# Altium PCB editable.pcbdoc
Units mil, origin at the board's own origin, x right, y up, seen from the top; angles counter-clockwise.
Board outline 2420 x 3435 mil, 2 copper layers (Top Layer, Bottom Layer); 17 components, 34 nets, 149 pads, 4 vias.
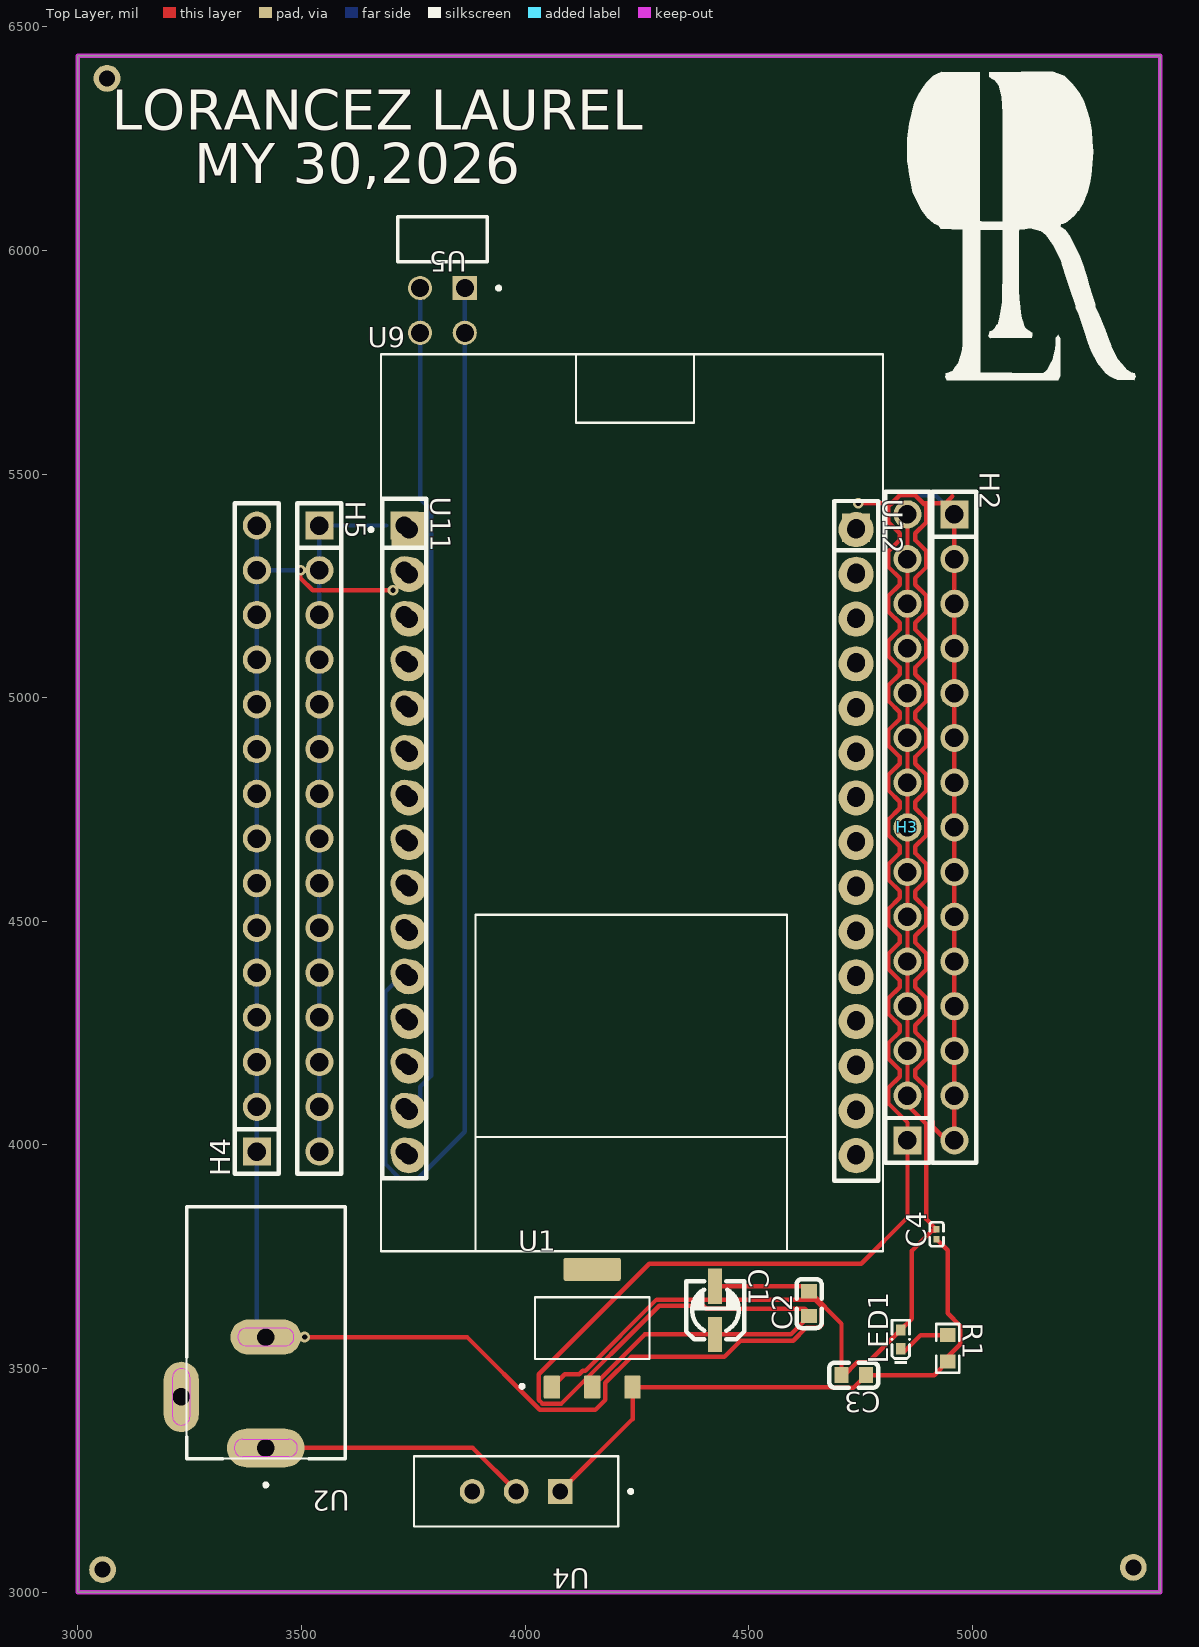
[diagram p0: Top Layer view]
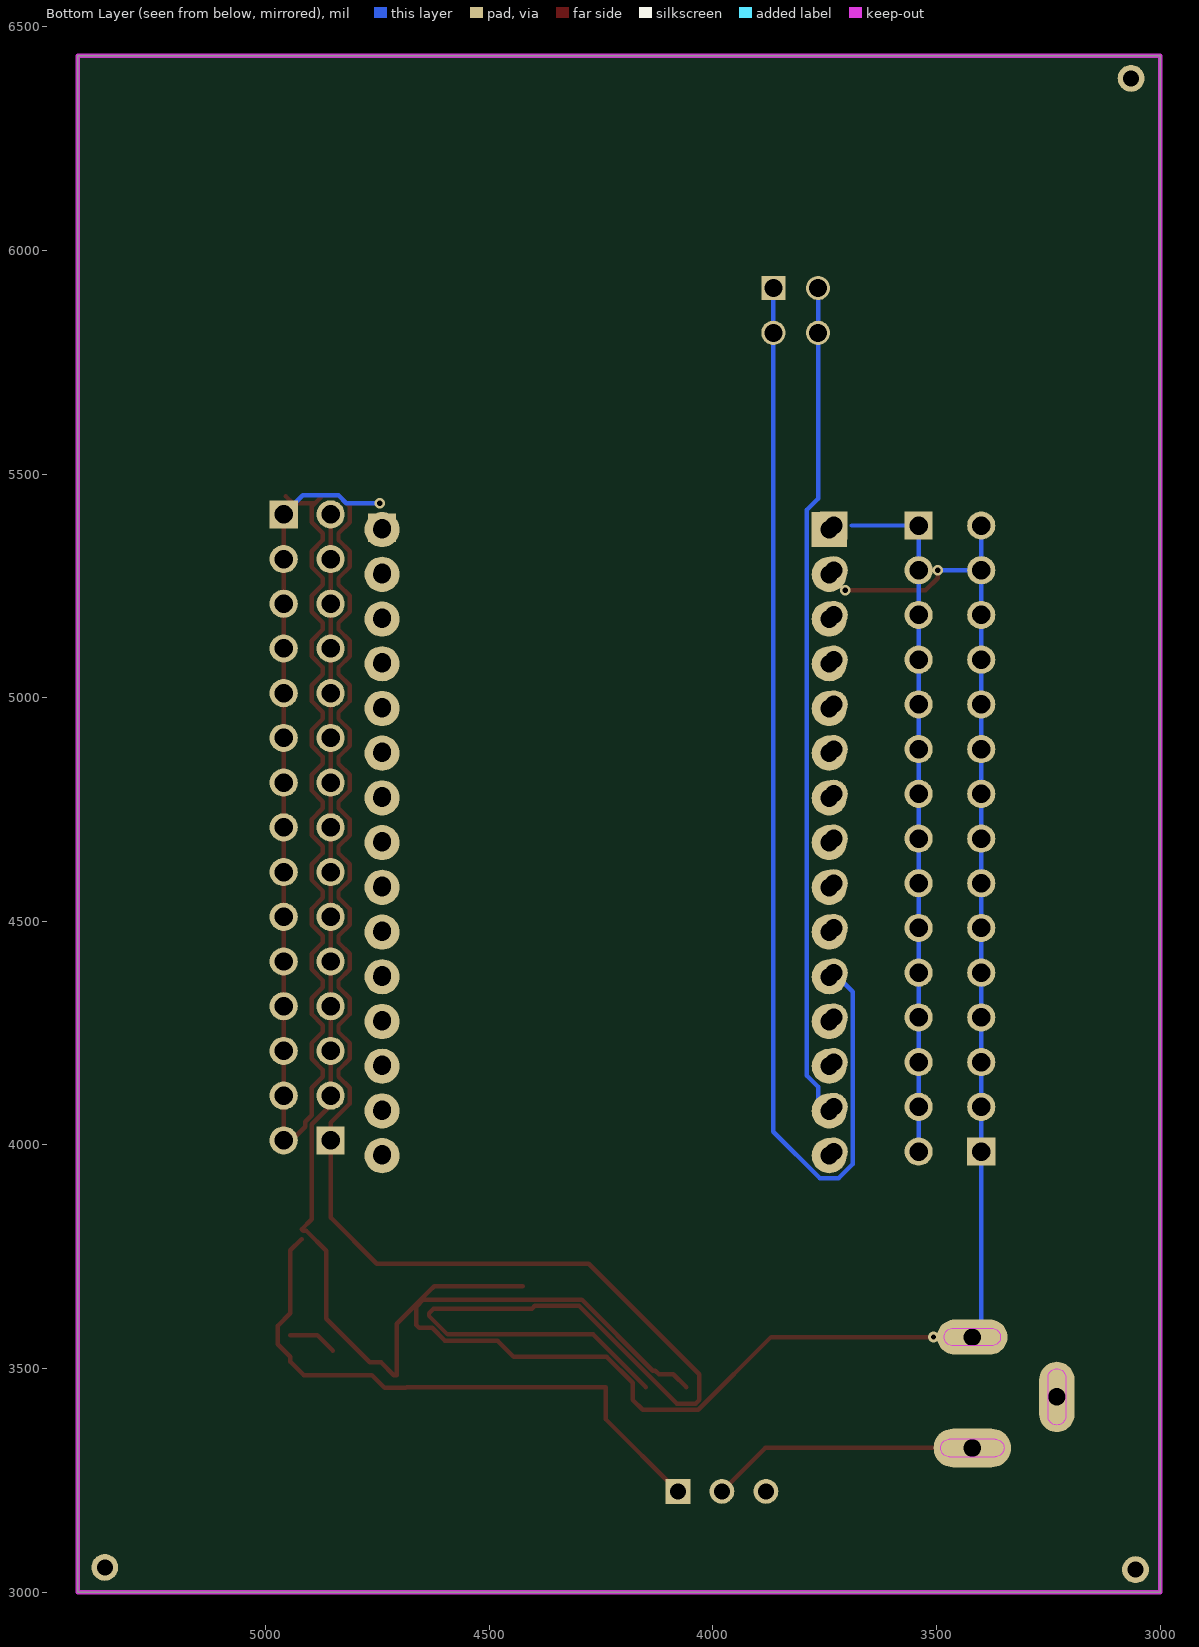
[diagram p1: Bottom Layer view, seen from below]

## Layer stack, top to bottom
Top Layer: signal copper (thickness not stored)
Dielectric: dielectric 12.6, FR-4, Dk 4.8
Bottom Layer: signal copper (thickness not stored)

## Board outline
3000,6435 5420,6435 5420,3000 3000,3000

## Design rules (kind name [scope] priority, off if disabled: settings)
BoardOutlineClearance copperThickness1oz [All] p0: genericclearance=10 ignorepadtopadclearanceinfootprint=FALSE except(0: Arc-SplitContinuation Track-SplitContinuation SMDPad-SplitContinuation THPad-SplitContinuation Via-SplitContinuation Fill-SplitContinuation Poly-SplitContinuation Region-SplitContinuation Text-SplitContinuation; 6: Track-CutoutEdge SMDPad-CutoutEdge THPad-CutoutEdge Via-CutoutEdge Region-CutoutEdge; 11.8: Track-OutlineEdge SMDPad-OutlineEdge THPad-OutlineEdge Via-OutlineEdge Fill-OutlineEdge Region-OutlineEdge Poly-OutlineEdge Text-OutlineEdge Fill-CutoutEdge)
BoardOutlineClearance copperThickness2oz [All] p0: genericclearance=10 ignorepadtopadclearanceinfootprint=FALSE except(0: Arc-SplitContinuation Track-SplitContinuation SMDPad-SplitContinuation THPad-SplitContinuation Via-SplitContinuation Fill-SplitContinuation Poly-SplitContinuation Region-SplitContinuation Text-SplitContinuation; 6: Track-CutoutEdge SMDPad-CutoutEdge THPad-CutoutEdge Via-CutoutEdge Region-CutoutEdge; 11.8: Track-OutlineEdge SMDPad-OutlineEdge THPad-OutlineEdge Via-OutlineEdge Fill-OutlineEdge Region-OutlineEdge Poly-OutlineEdge Text-OutlineEdge Fill-CutoutEdge)
Clearance copperThickness1oz [(InNet('GND') OR InNet('+5V') OR InNet('D13') OR InNet('D12') OR InNet('D14') OR InNet('D27') OR InNet('D26') OR InNet('D25') OR InNet('D33') OR InNet('D32') OR InNet('D35') OR InNet('D34') OR InNet('VN') OR InNet('VP') OR InNet('EN') OR InNet('VCC') OR InNet('D21') OR InNet('D22') OR InNet('3V3') OR InNet('D15') OR InNet('D2') OR InNet('D4') OR InNet('RX2') OR InNet('TX2') OR InNet('D5') OR InNet('D18') OR InNet('D19') OR InNet('RX0') OR InNet('TX0') OR InNet('D23') OR InNet('$1N9308') OR InNet('+3V3') OR InNet('VIN') OR InNet('$1N9299'))] p1: gap=7 ignorepadtopadclearanceinfootprint=FALSE except(4: Track-Track; 6: Track-SMDPad SMDPad-SMDPad Track-THPad SMDPad-THPad THPad-THPad Track-Via SMDPad-Via THPad-Via Via-Via SMDPad-Fill THPad-Fill Via-Fill Fill-Fill Track-Region SMDPad-Region THPad-Region Via-Region Region-Region Track-Poly SMDPad-Poly THPad-Poly Via-Poly Fill-Poly Region-Poly Poly-Poly Track-Text SMDPad-Text THPad-Text Via-Text Fill-Text Region-Text Poly-Text Text-Text; 6.9: Track-Hole SMDPad-Hole THPad-Hole Via-Hole Fill-Hole Region-Hole Poly-Hole Text-Hole Sheet-Hole; 11.8: Track-Fill Fill-Region Track-Sheet SMDPad-Sheet THPad-Sheet Via-Sheet Fill-Sheet Region-Sheet Poly-Sheet Text-Sheet)
Clearance copperThickness2oz [All] p1: gap=7 ignorepadtopadclearanceinfootprint=FALSE except(6: Track-SMDPad SMDPad-SMDPad Track-THPad SMDPad-THPad THPad-THPad Track-Via SMDPad-Via THPad-Via Via-Via SMDPad-Fill THPad-Fill Via-Fill Fill-Fill Track-Region SMDPad-Region THPad-Region Via-Region Region-Region Track-Poly SMDPad-Poly THPad-Poly Via-Poly Fill-Poly Region-Poly Poly-Poly Track-Text SMDPad-Text THPad-Text Via-Text Fill-Text Region-Text Poly-Text Text-Text; 6.9: Track-Hole SMDPad-Hole THPad-Hole Via-Hole Fill-Hole Region-Hole Poly-Hole Text-Hole Sheet-Hole; 8: Track-Track; 11.8: Track-Fill Fill-Region Track-Sheet SMDPad-Sheet THPad-Sheet Via-Sheet Fill-Sheet Region-Sheet Poly-Sheet Text-Sheet)
DiffPairsRouting differentialPair [All] p1: maxuncoupledlength=10 minlimit=6 maxlimit=6 mostfreqgap=6 toplayer_minwidth=5 toplayer_prefwidth=10 toplayer_maxwidth=100 bottomlayer_minwidth=5 bottomlayer_prefwidth=10 bottomlayer_maxwidth=100
PasteMaskExpansion pasteMaskExpansion [All] p1: expansion=0
PlaneConnect innerPlane [All] p1: planeconnectstyle=Relief reliefexpansion=20 reliefentries=4 reliefconductorwidth=10 reliefairgap=10
PolygonConnect copperRegion [All] p1: connectstyle=Relief reliefentries=4 reliefconductorwidth=10 polygonreliefangle="90 Angle" airgapwidth=10
RoutingVias viaSize [All] p1: viastyle="Through Hole" holewidth=12.0078 minholewidth=11.811 maxholewidth=248.0314 width=24.0158 minwidth=19.685 maxwidth=393.7008
SolderMaskExpansion solderMaskExpansion [All] p1: useseparateexpansions=TRUE expansion=2 expansionbottom=2
Width copperThickness1oz [All] p1: maxlimit=100 minlimit=5 preferedwidth=10
Width copperThickness2oz [All] p1: maxlimit=100 minlimit=8 preferedwidth=10

## Components (designator, comment, footprint, x,y, rotation, side; value= is the part's Value field where it differs from the comment)
C1 "C_Ele_SMD_3x5.4mm" CAP-SMD_BD3.0-L3.3-W3.3-RD 4425,3630 r270 top
C2 "CAP_0603" C0603 4635,3645 r90 top
C3 "CAP_0603" C0603 4735,3485 r180 top
C4 "CAP_0201" C0201 4920,3800 r90 top
H2 "2011-1X15G00SB" HDR-TH_15P-P2.54-V-M 4960,4710 r270 top
H3 "2011-1X15G00SB" HDR-TH_15P-P2.54-V-M 4855,4710 r90 top
H4 "2011-1X15G00SB" HDR-TH_15P-P2.54-V-M 3400,4685 r90 top
H5 "2011-1X15G00SB" HDR-TH_15P-P2.54-V-M 3540,4685 r270 top
LED1 "LED_0402-R" LED0402-RD_YELLOW 4840,3565 r90 top
R1 "Res_0603" R0603 4945,3545 r270 top
U1 "AMS1117-5.0" SOT229P700X180-4N 4150,3590 r0 top
U2 "DCJ200-10-A-XX-K_REVA" GCT_DCJ200-10-A-XX-K_REVA 3420,3580 r180 top
U4 "MINI-SPDT-SW" SW_MINI-SPDT-SW 3980,3225 r180 top
U5 "MTSW-102-10-L-D-472-RA" SAMTEC_MTSW-102-10-L-D-472-RA 3815,6025 r180 top
U9 "ESP32-DEVKIT-V1" MODULE_ESP32_DEVKIT_V1 4240,4765 r0 top
U11 "HX PM2.54-1x15P ZC" HDR-TH_15P-P2.54-V-F-1 3730,4685 r270 top
U12 "HX PM2.54-1x15P ZC" HDR-TH_15P-P2.54-V-F-1 4740,4680 r270 top

## Footprints (in the part's own frame and the unit in brackets; to place one, negate y for a bottom-side part, rotate by r counter-clockwise, add the part's x,y. Pads: shape width x height; smd on the part's side, far side on the other; paste and mask are expansions set on the pad)
C0201 [mil]
  rect 14.51x12.76 smd: 1(-10.8,0) 2(10.8,0)
  silkscreen extent -27,-15 27,15
C0603 [mm]
  rect 0.8x0.9 smd: 1(-0.7,0) 2(0.7,0)
  silkscreen extent -1.39,-0.71 1.39,0.71
CAP-SMD_BD3.0-L3.3-W3.3-RD [mm]
  rect 2x0.8 smd: 1(1.37,0) 2(-1.37,0)
  silkscreen extent -1.65,-1.64 1.65,1.66
GCT_DCJ200-10-A-XX-K_REVA [mm]
  oval 4.4x2.2 hole 1: 1(0,6.55)
  oval 4x2 hole 1: 2(0,0.25)
  oval 2x4 hole 1: 3(4.8,3.65)
  Board Outline Layer lines w0.003: 5.3,4.75 5.3,2.55 ; 5.3,4.75 5.3,2.55 ; 5.3,4.75 ccw(c4.8,4.75) 4.8,5.25 ; 5.3,4.75 ccw(c4.8,4.75) 4.8,5.25 ; 5.3,2.55 cw(c4.8,2.55) 4.8,2.05 ; 5.3,2.55 cw(c4.8,2.55) 4.8,2.05 ; 4.8,5.25 ccw(c4.8,4.75) 4.3,4.75 ; 4.8,5.25 ccw(c4.8,4.75) 4.3,4.75 ; 4.8,2.05 cw(c4.8,2.55) 4.3,2.55 ; 4.8,2.05 cw(c4.8,2.55) 4.3,2.55 ; 4.3,4.75 4.3,2.55 ; 4.3,4.75 4.3,2.55 ; 1.8,6.55 ccw(c1.3,6.55) 1.3,7.05 ; 1.8,6.55 ccw(c1.3,6.55) 1.3,7.05 ; 1.8,6.55 cw(c1.3,6.55) 1.3,6.05 ; 1.8,6.55 cw(c1.3,6.55) 1.3,6.05 ; 1.6,0.25 cw(c1.1,0.25) 1.1,-0.25 ; 1.6,0.25 cw(c1.1,0.25) 1.1,-0.25 ; 1.6,0.25 ccw(c1.1,0.25) 1.1,0.75 ; 1.6,0.25 ccw(c1.1,0.25) 1.1,0.75 ; 1.3,7.05 -1.3,7.05 ; 1.3,7.05 -1.3,7.05 ; 1.3,6.05 -1.3,6.05 ; 1.3,6.05 -1.3,6.05 ; 1.1,0.75 -1.1,0.75 ; 1.1,0.75 -1.1,0.75 ; 1.1,-0.25 -1.1,-0.25 ; 1.1,-0.25 -1.1,-0.25 ; -1.1,0.75 ccw(c-1.1,0.25) -1.6,0.25 ; -1.1,0.75 ccw(c-1.1,0.25) -1.6,0.25 ; -1.1,-0.25 cw(c-1.1,0.25) -1.6,0.25 ; -1.1,-0.25 cw(c-1.1,0.25) -1.6,0.25 ; -1.3,7.05 ccw(c-1.3,6.55) -1.8,6.55 ; -1.3,7.05 ccw(c-1.3,6.55) -1.8,6.55 ; -1.3,6.05 cw(c-1.3,6.55) -1.8,6.55 ; -1.3,6.05 cw(c-1.3,6.55) -1.8,6.55
  silkscreen extent -4.5,-7.15 4.5,8.75
HDR-TH_15P-P2.54-V-F-1 [mm]
  rect 1.6x1.575 hole 1: 1(-17.78,0)
  round 1.6 hole 1: 2(-15.24,0) 3(-12.7,0) 4(-10.16,0) 5(-7.62,0) 6(-5.08,0) 7(-2.54,0) 8(0,0) 9(2.54,0) 10(5.08,0) 11(7.62,0) 12(10.16,0) 13(12.7,0) 14(15.24,0) 15(17.78,0)
  silkscreen extent -19.3,-1.25 19.3,1.25
HDR-TH_15P-P2.54-V-M [mm]
  rect 1.6x1.6 hole 1.05: 1(-17.78,0)
  round 1.6 hole 1.05: 2(-15.24,0) 3(-12.7,0) 4(-10.16,0) 5(-7.62,0) 6(-5.08,0) 7(-2.54,0) 8(0,0) 9(2.54,0) 10(5.08,0) 11(7.62,0) 12(10.16,0) 13(12.7,0) 14(15.24,0) 15(17.78,0)
  silkscreen extent -19.05,-1.25 19.05,1.25
LED0402-RD_YELLOW [mm]
  rect 0.636x0.54 smd: 1(-0.538,0) 2(0.538,0)
  silkscreen extent -1.39,-0.54 1.09,0.54
MODULE_ESP32_DEVKIT_V1 [mm]
  rect 2x2 hole 1.02: 1(-12.7,15.515)
  round 2 hole 1.02: 2(-12.7,12.975) 3(-12.7,10.435) 4(-12.7,7.895) 5(-12.7,5.355) 6(-12.7,2.815) 7(-12.7,0.275) 8(-12.7,-2.265) 9(-12.7,-4.805) 10(-12.7,-7.345) 11(-12.7,-9.885) 12(-12.7,-12.425) 13(-12.7,-14.965) 14(-12.7,-17.505) 15(-12.7,-20.045) 16(12.7,-20.045) 17(12.7,-17.505) 18(12.7,-14.965) 19(12.7,-12.425) 20(12.7,-9.885) 21(12.7,-7.345) 22(12.7,-4.805) 23(12.7,-2.265) 24(12.7,0.275) 25(12.7,2.815) 26(12.7,5.355) 27(12.7,7.895) 28(12.7,10.435) 29(12.7,12.975) 30(12.7,15.515)
  silkscreen extent -14.95,-25.48 14.23,25.48
R0603 [mil]
  rect 31.75x34.02 smd: 1(-29.66,0) 2(29.66,0)
  silkscreen extent -55,-26 55,26
SAMTEC_MTSW-102-10-L-D-472-RA [mm]
  rect 1.37x1.37 hole 1.02: 01(-1.27,2.77)
  round 1.37 hole 1.02: 02(-1.27,5.31) 03(1.27,2.77) 04(1.27,5.31)
  silkscreen extent -3.29,-1.27 2.54,2.87
SOT229P700X180-4N [mm]
  rrect15% 0.93x1.31 smd: 1(-2.29,-3.345) 2(0,-3.345) 3(2.29,-3.345)
  rrect15% 3.24x1.31 smd: 4(0,3.345)
  silkscreen extent -4.09,-3.4 3.25,1.75
SW_MINI-SPDT-SW [mm]
  rect 1.408x1.408 hole 0.9: 1(-2.5,0)
  round 1.408 hole 0.9: 2(0,0) 3(2.5,0)
  silkscreen extent -6.6,-2 5.8,2

## Free pads (board coordinates)
  round 60 hole 36: 1(5360,3055) 2(3055,3050) 3(3065,6385)

## Via types
v1: diameter 24.02, hole 12.01, Top Layer to Bottom Layer, 4 vias

## Nets (pads, with @x,y where several pads share a name; then routed paths per layer and width w, separated by ;. In a path a pad name is that pad's centre, name@x,y a point inside that pad or via, vN(x,y) a via of type N, cw(c..) or ccw(c..) an arc to the next point about the centre after c; other vN are vias at no path point)
3V3: U9.1
$1N9299: LED1.1 R1.1 | length 109.4
  Top Layer w10: LED1.1@4850,3540 4884.66,3574.66 R1.1
$1N9308: U2.1 U4.2 | length 512.6
  Top Layer w10: 3507.68,3322.13 3882.87,3322.13 U4.2
+3V3: H5.1 H5.2 H5.3 H5.4 H5.5 H5.6 H5.7 H5.8 H5.9 H5.10 H5.11 H5.12 H5.13 H5.14 H5.15 U11.1 | length 1549.6
  Bottom Layer w10: H5.15 H5.14 H5.13 H5.12 H5.11 H5.10 H5.9 H5.8 H5.7 H5.6 H5.5 H5.4 H5.3 H5.2 H5.1 3689.65,5385
+5V: C1.1 C2.1 H2.1 H2.2 H2.3 H2.4 H2.5 H2.6 H2.7 H2.8 H2.9 H2.10 H2.11 H2.12 H2.13 H2.14 H2.15 H3.1 U1.2 U12.1 | length 7778.6
  Top Layer w10: U1.2 4267.76,3576.06 C1.1 4593.62,3576.06 C2.1 4635,3623.56 4624.98,3633.58 4404.7,3633.58 4398.27,3640.02 4299.57,3640.02 4081.09,3421.54 4038.59,3421.54 4030.55,3429.58 4030.55,3487.04 4277.81,3734.29 4751.85,3734.29 4855,3837.44 H3.1 4855,4049.92 4812.52,4092.4 4812.52,4127.6 4837.4,4152.48 4837.4,4167.52 4812.52,4192.4 4812.52,4227.6 4837.4,4252.48 4837.4,4267.52 4812.52,4292.4 4812.52,4327.6 4837.4,4352.48 4837.4,4367.52 4812.52,4392.4 4812.52,4427.6 4837.4,4452.48 4837.4,4467.52 4812.52,4492.4 4812.52,4527.6 4837.4,4552.48 4837.4,4567.52 4812.52,4592.4 4812.52,4627.6 4837.4,4652.48 4837.4,4667.52 4812.52,4692.4 4812.52,4727.6 4837.4,4752.48 4837.4,4767.52 4812.52,4792.4 4812.52,4827.6 4837.4,4852.48 4837.4,4867.52 4812.52,4892.4 4812.52,4927.6 4837.4,4952.48 4837.4,4967.52 4812.52,4992.4 4812.52,5027.6 4837.4,5052.48 4837.4,5067.52 4812.52,5092.4 4812.52,5127.6 4837.4,5152.48 4837.4,5167.52 4812.52,5192.4 4812.52,5227.6 4837.4,5252.48 4837.4,5267.52 4812.52,5292.4 4812.52,5327.6 4837.4,5352.48 4837.4,5367.52 4812.52,5392.4 4812.52,5427.6 4819.92,5435 ; v1(4745,5435) 4819.92,5435 ; 4955,5450 4940,5435 4890.08,5435 ; H2.1 H2.2 H2.3 H2.4 H2.5 H2.6 H2.7 H2.8 H2.9 H2.10 H2.11 H2.12 H2.13 H2.14 H2.15 4941.74,4010 4911.5,4040.24 4911.5,4051.85 4897.48,4065.87 4897.48,4127.6 4872.6,4152.48 4872.6,4167.52 4897.48,4192.4 4897.48,4227.6 4872.6,4252.48 4872.6,4267.52 4897.48,4292.4 4897.48,4327.6 4872.6,4352.48 4872.6,4367.52 4897.48,4392.4 4897.48,4427.6 4872.6,4452.48 4872.6,4467.52 4897.48,4492.4 4897.48,4527.6 4872.6,4552.48 4872.6,4567.52 4897.48,4592.4 4897.48,4627.6 4872.6,4652.48 4872.6,4667.52 4897.48,4692.4 4897.48,4727.6 4872.6,4752.48 4872.6,4767.52 4897.48,4792.4 4897.48,4827.6 4872.6,4852.48 4872.6,4867.52 4897.48,4892.4 4897.48,4927.6 4872.6,4952.48 4872.6,4967.52 4897.48,4992.4 4897.48,5027.6 4872.6,5052.48 4872.6,5067.52 4897.48,5092.4 4897.48,5127.6 4872.6,5152.48 4872.6,5167.52 4897.48,5192.4 4897.48,5227.6 4872.6,5252.48 4872.6,5267.52 4897.48,5292.4 4897.48,5327.6 4872.6,5352.48 4872.6,5367.52 4897.48,5392.4 4897.48,5427.6 4890.08,5435 ; 4819.92,5435 4837.4,5452.48 4872.6,5452.48 4890.08,5435
  Bottom Layer w10: v1(4745,5435) 4819.92,5435 4837.4,5452.48 4917.52,5452.48 H2.1
D2: U9.4 U11.4
D4: U9.5 U11.5
D5: U9.8 U11.8
D12: U9.27 U12.4
D13: U9.28 U12.3
D14: U9.26 U12.5
D15: U9.3 U11.3
D18: U9.9 U11.9
D19: U9.10 U11.10
D21: U5.01 U5.02 U9.11 U11.11 | length 2565.5
  Bottom Layer w10: U11.11 3687.52,4342.52 3687.52,3957.1 3719.14,3925.47 3760.86,3925.47 3865,4029.61 U5.02 U5.01
D22: U5.03 U5.04 U9.14 U11.14 | length 1871.5
  Bottom Layer w10: U9.14 3765,4100.83 3765,4129.61 3790.35,4154.97 3790.35,5419.75 3765,5445.1 U5.04 U5.03
D23: U9.15 U11.15
D25: U9.23 U12.8
D26: U9.24 U12.7
D27: U9.25 U12.6
D32: U9.21 U12.10
D33: U9.22 U12.9
D34: U9.19 U12.12
D35: U9.20 U12.11
EN: U9.16 U12.15
GND: C1.2 C2.2 C3.2 C4.2 H3.2 H3.3 H3.4 H3.5 H3.6 H3.7 H3.8 H3.9 H3.10 H3.11 H3.12 H3.13 H3.14 H3.15 H4.1 H4.2 H4.3 H4.4 H4.5 H4.6 H4.7 H4.8 H4.9 H4.10 H4.11 H4.12 H4.13 H4.14 H4.15 LED1.2 U1.1 U2.2 U11.2 U12.2 | length 6678.1
  Top Layer w10: v1(3497.52,5285) 3497.52,5267.4 3524.7,5240.22 v1(3704.39,5240.22) ; v1@3499.8,3570.16 3870.15,3570.16 4032.79,3407.52 4157.23,3407.52 4179.29,3429.58 4179.29,3467.78 4237.22,3525.71 4445.3,3525.71 4481.64,3562.05 4599.43,3562.05 4628.09,3590.71 4657.27,3590.71 4663.7,3597.14 4663.7,3637.74 4647.41,3654.03 4293.77,3654.03 4134.81,3495.08 4128.75,3495.08 4120.71,3487.04 4088.57,3487.04 U1.1 ; C1.2 4623.62,3683.94 C2.2 4707.44,3600.12 C3.2 4713.56,3485 4742.26,3513.7 4767.51,3513.7 LED1.2 4865,3611.19 4865,3763.36 4909.07,3807.44 4916.64,3807.44 C4.2 4897.48,3833.32 4897.48,4046.05 4855,4088.53 H3.3 H3.4 H3.5 H3.6 H3.7 H3.8 H3.9 H3.10 H3.11 H3.12 H3.13 H3.14 H3.15
  Bottom Layer w10: U2.2@3400,3606.65 H4.1 H4.2 H4.3 H4.4 H4.5 H4.6 H4.7 H4.8 H4.9 H4.10 H4.11 H4.12 H4.13 H4.14 ; H4.15 H4.14 ; v1(3497.52,5285) H4.14 ; v1@3499.8,3570.16 v1(3506.81,3570.16)
RX0: U9.12 U11.12
RX2: U9.6 U11.6
TX0: U9.13 U11.13
TX2: U9.7 U11.7
VCC: C3.1 C4.1 R1.2 U1.3 U4.1 | length 1337.8
  Top Layer w10: U4.1 4240.16,3386.73 U1.3 4685.13,3458.31 4687.14,3456.3 4733.86,3456.3 C3.1 4914.66,3485 R1.2 4945,3526.24 4972.99,3554.23 4972.99,3595.09 4945,3623.08 4945,3764.2 C4.1
VIN: U9.30
VN: U9.18 U12.13
VP: U9.17 U12.14
pads on no net: U1.4 U2.3 U4.3 U9.2 U9.29

## Keep-outs
Board Outline Layer:
  the board outline again, w10

## Silkscreen, mask and mechanical layers (free items; w line width, h text height)
Top Silkscreen Layer:
  region: 231 vertices and 2 holes, not listed, extent 4855,5710 5365,6400
  text "LORANCEZ LAUREL" at 3075,6270 h90
  text "MY 30,2026" at 3260,6150 h90